# EAGLE board acs711-shield (EAGLE 6.5.0)
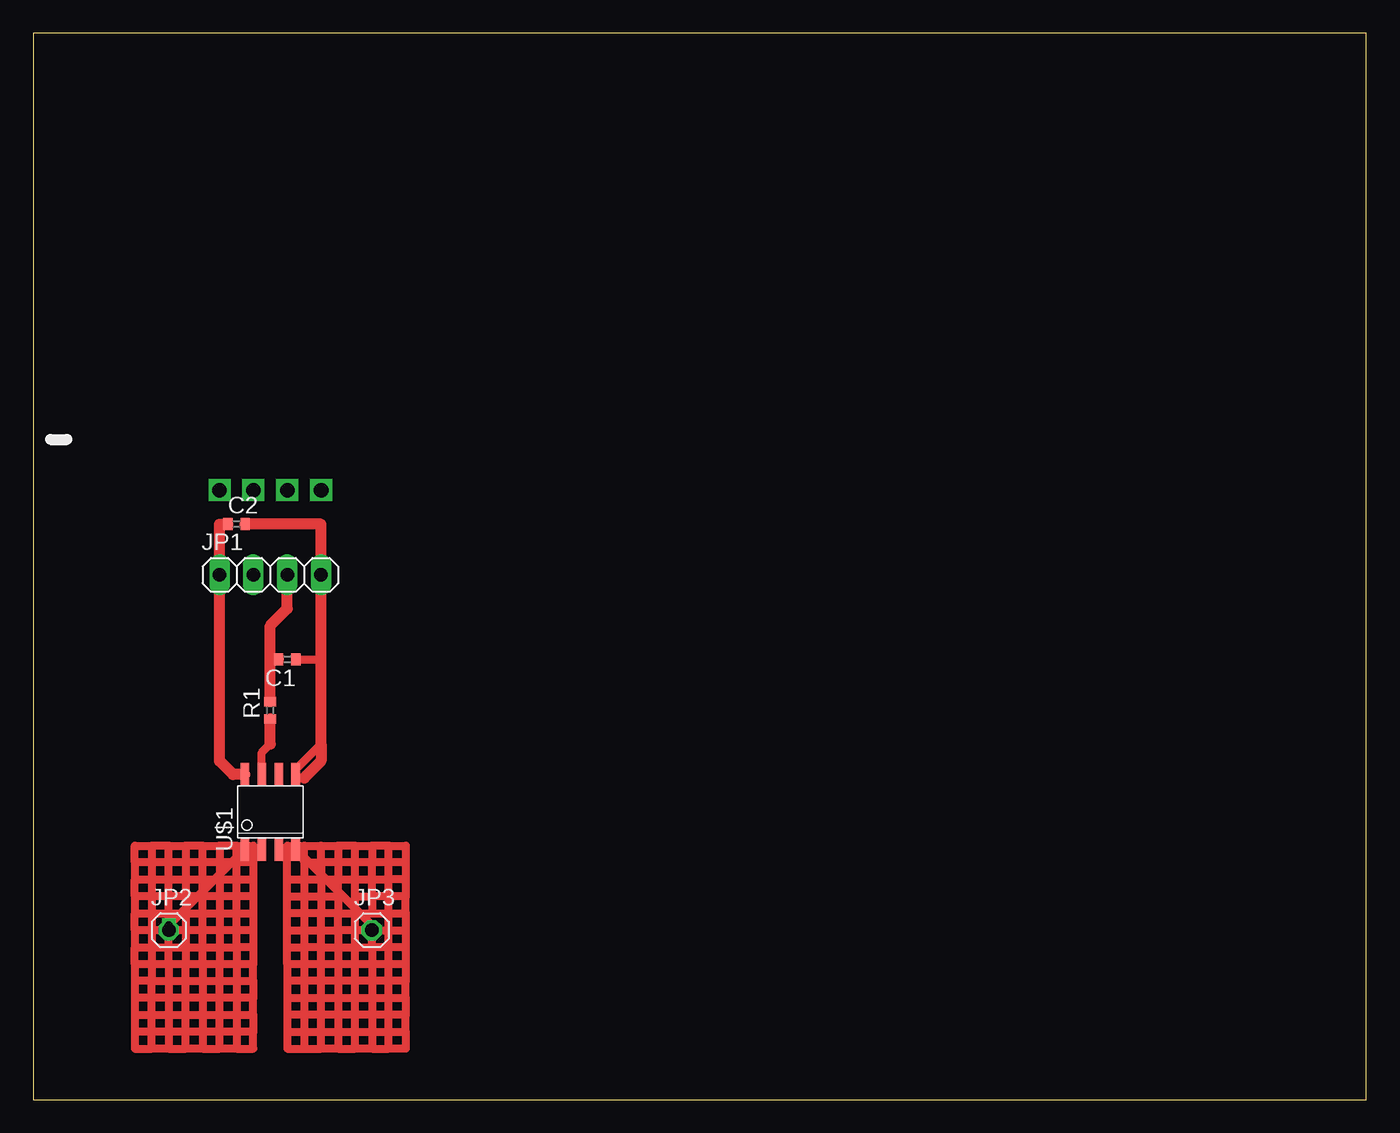
[diagram p0: board, top side]
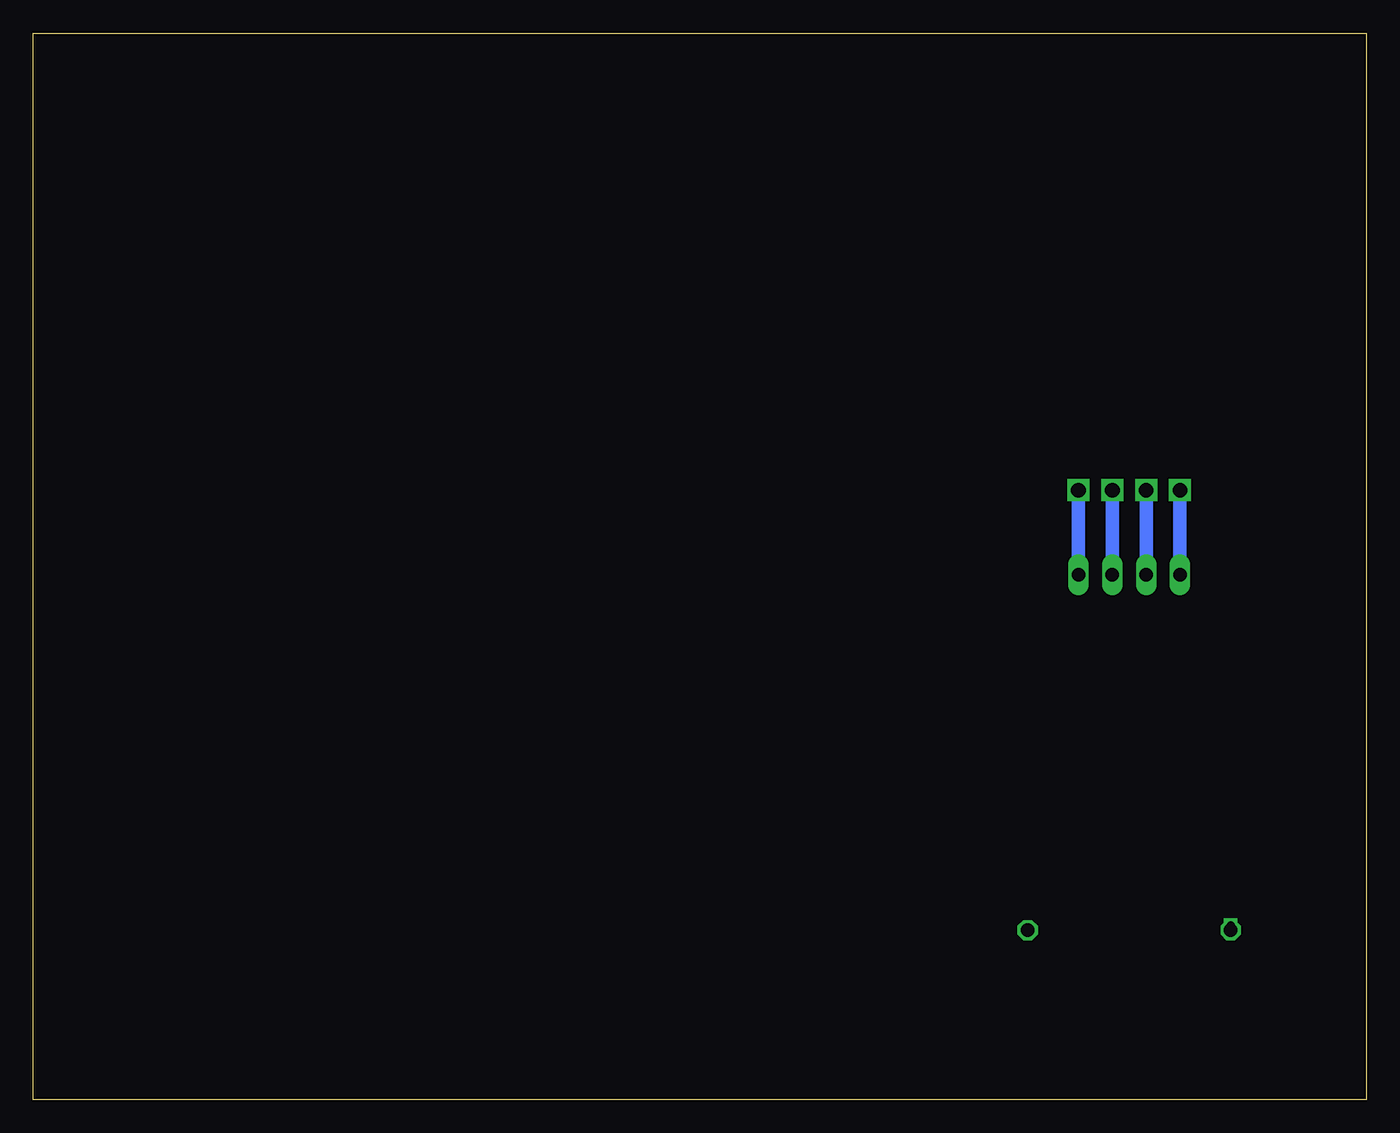
[diagram p1: board, bottom side, seen from below]

Size 100 x 80 mm. Coordinates in mm from the lower left corner, seen from the top.
Outline: 0,0 100,0 100,80 0,80 0,0
Copper layers (1*16): Top 0.035mm / dielectric 1.5mm / Bottom 0.035mm
Design rules "default": minimum track width 10mil, minimum drill 24mil, track to track 8mil, track to pad 8mil, pad to pad 8mil, via to via 8mil, smd to smd 8mil, copper to edge 40mil, drill to drill 8mil, minimum pad ring 10mil, minimum via ring 8mil, stop-mask expansion 4mil, vias tented up to drill 0mil, thermal gap 10mil

## Footprints (pad centres in the part's own frame; a part is rotated, then mirrored left to right if it is on the bottom)
C0402 = smd 0.7 x 0.9: 1 -0.65,0; 2 0.65,0
1X04 = drill 1.016 long: 1 -3.81,0; 2 -1.27,0; 3 1.27,0; 4 3.81,0
1X01 = drill 1.016 octagon: 1 0,0
R0402 = smd 0.7 x 0.9: 1 -0.65,0; 2 0.65,0
SOIC8 = smd 0.65 x 1.75: 1 -1.905,-2.8; 2 -0.635,-2.8; 3 0.635,-2.8; 4 1.905,-2.8; 5 1.905,2.8; 6 0.635,2.8; 7 -0.635,2.8; 8 -1.905,2.8

## Placement (x,y rotation side)
C1  1  [C0402]  19.05,33.02 180 top
C2  1  [C0402]  15.24,43.18 0 top
JP1  1  [1X04]  17.78,39.37 0 top
JP2  1  [1X01]  10.16,12.7 0 top
JP3  1  [1X01]  25.4,12.7 0 top
R1  1  [R0402]  17.78,29.21 90 top
U$1  ACS711  [SOIC8]  17.78,21.59 0 top

## Library data of the parts
C1 C2 R1 = resistor
JP1-JP3 = pinhead
U$1 = acs711

## Nets
N$1: JP2.1 U$1.1 U$1.2
N$3: C1.1 C2.2 JP1.4 U$1.5
N$4: C1.2 JP1.3 R1.2
N$5: C2.1 JP1.1 U$1.8
N$6: R1.1 U$1.7
N$7: JP3.1 U$1.3 U$1.4

## Tracks (layer width: path | path; a pad name or v marks a point on that pad's centre or on a via)
N$1  (via drill 0.6)
  Top 0.61: v10.16,13.07 U$1.1 U$1.2
  Bottom 0.406: JP2.1 v10.16,13.07
N$2  (via drill 1.1)
  Bottom 1.016: v13.97,45.72 13.97,40.64
N$3  (via drill 1.1)
  Top 0.61: U$1.5 19.68,24.77 21.59,26.67 | C1.1 21.59,33.02
  Top 0.813: C2.2 21.59,43.18 JP1.4 21.59,33.02 21.59,26.67 21.59,25.4 20.32,24.13
  Bottom 1.016: v21.59,45.72 JP1.4 | v19.05,45.72 19.05,40.64 | v16.51,45.72 16.51,40.64
N$4
  Top 0.813: R1.2 17.78,33.02 | C1.2 17.78,33.02 | 17.78,33.02 17.78,35.56 19.05,36.83 JP1.3
N$5
  Top 0.813: U$1.8 14.98,24.39 13.97,25.4 JP1.1 13.97,43.18 C2.1
N$6
  Top 0.61: U$1.7 17.14,26.04 17.78,26.67
  Top 0.813: 17.78,26.67 R1.1
N$7
  Top 0.61: 20.32,19.05 19.05,19.05 19.05,16.51 | 20.32,17.78 20.32,11.43 | 19.05,12.7 19.05,13.97 | 19.05,15.24 19.05,16.51 | 19.05,16.51 21.59,16.51 | 21.59,16.51 21.59,15.24 | 21.59,15.24 21.59,13.97 | 21.59,11.43 20.32,11.43 | 19.05,11.43 19.05,12.7 | 19.05,12.7 21.59,12.7 | 21.59,12.7 21.59,13.97 | 21.59,13.97 19.05,13.97 | 19.05,13.97 19.05,15.24 | 19.05,15.24 21.59,15.24 | 21.59,15.24 22.86,15.24 | 22.86,15.24 22.86,16.51 | 20.32,17.78 21.59,17.78 | 21.59,17.78 21.59,16.51 | 21.59,16.51 22.86,16.51 | 22.86,15.24 22.86,13.97 | 21.59,11.43 21.59,12.7 | 21.59,12.7 22.86,12.7 | 22.86,12.7 22.86,13.97 | 22.86,13.97 21.59,13.97 | 22.86,13.97 24.13,13.97 | 24.13,12.7 22.86,12.7 | 22.86,12.7 22.86,11.43 | 22.86,11.43 24.13,11.43 | 24.13,11.43 24.13,12.7 | 24.13,13.97 24.13,15.24 | 24.13,15.24 24.13,16.51 | 24.13,16.51 24.13,17.78 | 22.86,17.78 22.86,16.51 | 22.86,16.51 24.13,16.51 | 24.13,16.51 25.4,16.51 | 25.4,16.51 26.67,16.51 | 27.94,16.51 27.94,15.24 | 27.94,13.97 27.94,12.7 | 27.94,12.7 27.94,11.43 | 27.94,11.43 27.94,10.16 | 27.94,10.16 26.67,10.16 | 25.4,10.16 24.13,10.16 | 22.86,10.16 21.59,10.16 | 20.32,10.16 19.05,10.16 | 19.05,10.16 19.05,11.43 | 19.05,11.43 20.32,11.43 | 20.32,11.43 20.32,10.16 | 21.59,10.16 21.59,11.43 | 21.59,11.43 22.86,11.43 | 22.86,11.43 22.86,10.16 | 24.13,10.16 24.13,11.43 | 24.13,11.43 25.4,11.43 | 27.94,11.43 26.67,11.43 | 26.67,11.43 26.67,12.7 | 26.67,12.7 27.94,12.7 | JP3.1 24.13,12.7 | 24.13,12.7 24.13,13.97 | 24.13,13.97 25.4,13.97 | 26.67,13.97 27.94,13.97 | 27.94,13.97 27.94,15.24 | 27.94,15.24 25.4,15.24 | 24.13,15.24 25.4,15.24 | 25.4,15.24 25.4,16.51 | 25.4,15.24 25.4,13.97 | 25.4,13.97 26.67,13.97 | 26.67,13.97 26.67,16.51 | 26.67,16.51 26.67,17.78
  Top 0.61: 26.67,17.78 25.4,17.78 | 27.94,17.78 27.94,16.51 | 27.94,16.51 26.67,16.51 | 25.4,16.51 25.4,17.78 | 24.13,17.78 22.86,17.78 | 20.32,17.78 20.32,19.05 | 20.32,19.05 21.59,19.05 | 21.59,19.05 22.86,19.05 | 24.13,19.05 25.4,19.05 | 26.67,19.05 27.94,19.05 27.94,17.78 | 27.94,17.78 26.67,17.78 | 26.67,17.78 26.67,19.05 | 26.67,19.05 25.4,19.05 | 25.4,19.05 25.4,17.78 | 25.4,17.78 24.13,17.78 | 24.13,17.78 24.13,19.05 | 24.13,19.05 22.86,19.05 | 22.86,19.05 22.86,17.78 | 22.86,17.78 21.59,17.78 | 21.59,17.78 21.59,19.05 | 25.4,11.43 25.4,10.16 | 26.67,10.16 26.67,11.43 | 26.67,11.43 25.4,11.43 | JP3.1 25.4,13.07 U$1.4 U$1.3 | 25.4,11.43 JP3.1 | JP3.1 26.67,12.7 | 26.67,12.7 26.67,13.97 | 19.05,10.16 19.05,8.89 | 19.05,7.62 19.05,6.35 | 19.05,5.08 19.05,3.81 20.32,3.81 | 20.32,3.81 21.59,3.81 | 22.86,3.81 24.13,3.81 | 25.4,3.81 26.67,3.81 | 27.94,5.08 27.94,6.35 | 27.94,7.62 27.94,8.89 | 27.94,10.16 27.94,8.89 | 27.94,8.89 19.05,8.89 | 19.05,8.89 19.05,7.62 | 19.05,7.62 27.94,7.62 | 27.94,7.62 27.94,6.35 | 27.94,6.35 19.05,6.35 | 19.05,6.35 19.05,5.08 | 19.05,5.08 27.94,5.08 | 27.94,5.08 27.94,3.81 26.67,3.81 | 26.67,3.81 26.67,10.16 | 26.67,10.16 25.4,10.16 | 25.4,10.16 25.4,3.81 | 25.4,3.81 24.13,3.81 | 24.13,3.81 24.13,10.16 | 24.13,10.16 22.86,10.16 | 22.86,10.16 22.86,3.81 | 22.86,3.81 21.59,3.81 | 21.59,3.81 21.59,10.16 | 21.59,10.16 20.32,10.16 | 20.32,10.16 20.32,3.81
N$8
  Top 0.61: 16.51,17.78 16.51,16.51 | 16.51,15.24 16.51,13.97 | 16.51,12.7 16.51,11.43 | 16.51,11.43 16.51,10.16 | 15.24,10.16 13.97,10.16 | 12.7,10.16 11.43,10.16 | 10.16,10.16 8.89,10.16 | 8.89,10.16 7.62,10.16 | 7.62,10.16 7.62,11.43 | 7.62,12.7 7.62,13.97 | 7.62,15.24 7.62,16.51 | 7.62,17.78 7.62,19.05 8.89,19.05 | 10.16,19.05 11.43,19.05 | 12.7,19.05 13.97,19.05 | 15.24,19.05 16.51,19.05 16.51,17.78 | 16.51,17.78 7.62,17.78 | 7.62,17.78 7.62,16.51 | 7.62,16.51 16.51,16.51 | 16.51,16.51 16.51,15.24 | 16.51,15.24 7.62,15.24 | 7.62,15.24 7.62,13.97 | 7.62,13.97 16.51,13.97 | 16.51,13.97 16.51,12.7 | 16.51,12.7 7.62,12.7 | 7.62,12.7 7.62,11.43 | 7.62,11.43 15.24,11.43 | 16.51,11.43 15.24,11.43 | 15.24,11.43 15.24,10.16 | 15.24,11.43 15.24,19.05 | 15.24,19.05 13.97,19.05 | 13.97,19.05 13.97,10.16 | 12.7,10.16 12.7,19.05 | 12.7,19.05 11.43,19.05 | 11.43,19.05 11.43,10.16 | 10.16,10.16 10.16,19.05 | 10.16,19.05 8.89,19.05 | 8.89,19.05 8.89,10.16 | 7.62,10.16 7.62,8.89 | 7.62,8.89 7.62,7.62 | 7.62,6.35 7.62,5.08 | 7.62,5.08 7.62,3.81 8.89,3.81 | 10.16,3.81 11.43,3.81 | 12.7,3.81 13.97,3.81 | 15.24,3.81 16.51,3.81 16.51,5.08 | 16.51,6.35 16.51,7.62 | 16.51,8.89 16.51,10.16 | 16.51,10.16 15.24,10.16 | 15.24,10.16 15.24,3.81 | 15.24,3.81 13.97,3.81 | 13.97,3.81 13.97,10.16 | 13.97,10.16 12.7,10.16 | 12.7,10.16 12.7,3.81 | 12.7,3.81 11.43,3.81 | 11.43,3.81 11.43,10.16 | 11.43,10.16 10.16,10.16 | 10.16,10.16 10.16,3.81 | 10.16,3.81 8.89,3.81 | 8.89,3.81 8.89,8.89 | 8.89,10.16 8.89,8.89 | 8.89,8.89 7.62,8.89 | 8.89,8.89 16.51,8.89 | 16.51,8.89 16.51,7.62 | 16.51,7.62 7.62,7.62 | 7.62,7.62 7.62,6.35 | 7.62,6.35 16.51,6.35 | 16.51,6.35 16.51,5.08 | 16.51,5.08 7.62,5.08